# Altium PCB led30.PcbDoc
Units mm, origin at the board's own origin, x right, y up, seen from the top; angles counter-clockwise.
Board outline 15 x 170 mm, 2 copper layers (Top Layer, Bottom Layer); 63 components, 125 nets, 472 pads, 92 vias.
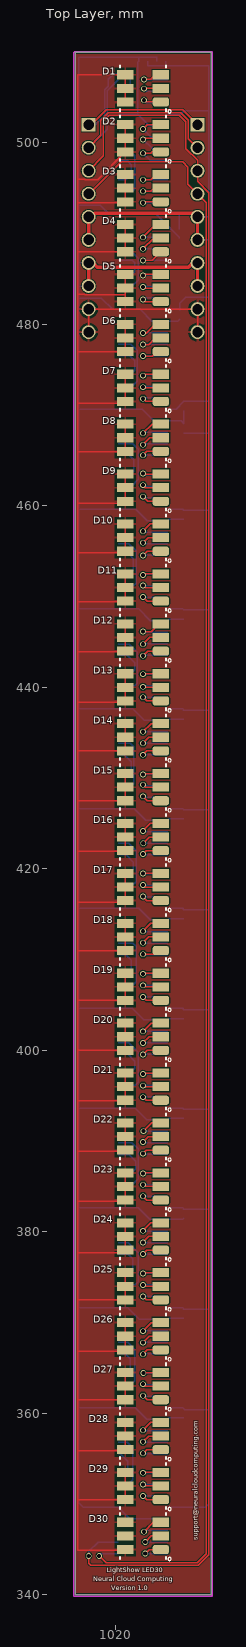
[diagram p0: Top Layer view]
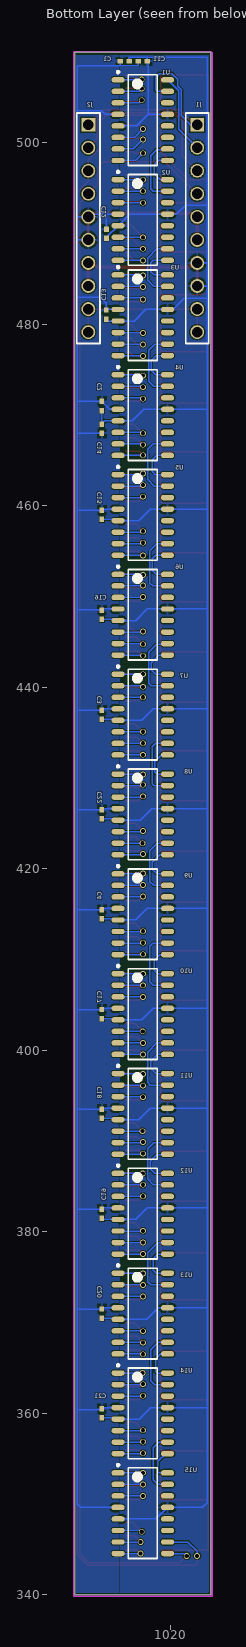
[diagram p1: Bottom Layer view, seen from below]

## Layer stack, top to bottom
Top Solder: solder mask 0.0102, Solder Resist, Dk 3.5
Top Layer: signal copper 0.0356
Dielectric 1: dielectric 0.32, FR-4, Dk 4.8
Bottom Layer: signal copper 0.0356
Bottom Solder: solder mask 0.0102, Solder Resist, Dk 3.5

## Board outline
1015.5,510 1015.5,340 1030.5,340 1030.5,510 1020,510

## Design rules (kind name [scope] priority, off if disabled: settings)
Clearance [All] p1: gap=0.127
PolygonConnect [All] p1: connectstyle=Relief reliefconductorwidth=0.254 reliefentries=4 polygonreliefangle="90 Angle" airgapwidth=0.254
RoomDefinition led30Sheet1 [InComponentClass('led30Sheet1')] p1: confinementstyle=ConfineIn formatcopy=TRUE lockcomponents=FALSE outline 0,0 50.8,0 50.8,25.4 0,25.4
RoutingLayers RoutingLayers_VCCBAT [InNet('VCCBAT')] p1 off: top layer_v5=TRUE bottom layer_v5=FALSE
RoutingLayers RoutingLayers_VCC [InNet('VCC')] p2 off: top layer_v5=TRUE bottom layer_v5=FALSE
RoutingLayers RoutingLayers_GND [InNet('GND')] p3 off: top layer_v5=FALSE bottom layer_v5=TRUE
RoutingLayers [All] p4: top layer_v5=TRUE bottom layer_v5=TRUE
RoutingVias [All] p1: holewidth=0.457 width=0.635 viastyle="Through Hole" minholewidth=0.457 minwidth=0.635 maxholewidth=0.457 maxwidth=0.635
SolderMaskExpansion [All] p1: expansion=0.102
Width [All] p1: maxlimit=0.152 minlimit=0.152 preferedwidth=0.152 minimp=50.000000 maximp=50.000000 favimp=50.000000
29 further rules are at their usual default settings.

## Components (designator, comment, footprint, x,y, rotation, side; value= is the part's Value field where it differs from the comment)
C1 "Cap Semi" 0402 1025,509 r180 bottom
C2 "Cap Semi" 0402 1027.5,471 r270 bottom
C3 "Cap Semi" 0402 1027.5,437 r270 bottom
C4 "Cap Semi" 0402 1027.5,415 r270 bottom
C11 "Cap Semi" 0402 1023,509 r0 bottom
C12 "Cap Semi" 0402 1027,490 r90 bottom
C13 "Cap Semi" 0402 1027.049,481.076 r90 bottom
C14 "Cap Semi" 0402 1027.5,468.5 r270 bottom
C15 "Cap Semi" 0402 1027.5,459 r90 bottom
C16 "Cap Semi" 0402 1027.5,448 r90 bottom
C17 "Cap Semi" 0402 1027.5,404 r90 bottom
C18 "Cap Semi" 0402 1027.5,393 r90 bottom
C19 "Cap Semi" 0402 1027.5,382 r90 bottom
C20 "Cap Semi" 0402 1027.5,371 r90 bottom
C21 "Cap Semi" 0402 1027.5,360 r270 bottom
C22 "Cap Semi" 0402 1027.5,426 r270 bottom
D1 "Wayjun5050SMD" SON150P500X150_HS-7N 1023,506 r0 top
D2 "Wayjun5050SMD" SON150P500X150_HS-7N 1023,500.5 r0 top
D3 "Wayjun5050SMD" SON150P500X150_HS-7N 1023,495 r0 top
D4 "Wayjun5050SMD" SON150P500X150_HS-7N 1023,489.5 r0 top
D5 "Wayjun5050SMD" SON150P500X150_HS-7N 1023,484 r0 top
D6 "Wayjun5050SMD" SON150P500X150_HS-7N 1023,478.5 r0 top
D7 "Wayjun5050SMD" SON150P500X150_HS-7N 1023,473 r0 top
D8 "Wayjun5050SMD" SON150P500X150_HS-7N 1023,467.5 r0 top
D9 "Wayjun5050SMD" SON150P500X150_HS-7N 1023,462 r0 top
D10 "Wayjun5050SMD" SON150P500X150_HS-7N 1023,456.5 r0 top
D11 "Wayjun5050SMD" SON150P500X150_HS-7N 1023,451 r0 top
D12 "Wayjun5050SMD" SON150P500X150_HS-7N 1023,445.5 r0 top
D13 "Wayjun5050SMD" SON150P500X150_HS-7N 1023,440 r0 top
D14 "Wayjun5050SMD" SON150P500X150_HS-7N 1023,434.5 r0 top
D15 "Wayjun5050SMD" SON150P500X150_HS-7N 1023,429 r0 top
D16 "Wayjun5050SMD" SON150P500X150_HS-7N 1023,423.5 r0 top
D17 "Wayjun5050SMD" SON150P500X150_HS-7N 1023,418 r0 top
D18 "Wayjun5050SMD" SON150P500X150_HS-7N 1023,412.5 r0 top
D19 "Wayjun5050SMD" SON150P500X150_HS-7N 1023,407 r0 top
D20 "Wayjun5050SMD" SON150P500X150_HS-7N 1023,401.5 r0 top
D21 "Wayjun5050SMD" SON150P500X150_HS-7N 1023,396 r0 top
D22 "Wayjun5050SMD" SON150P500X150_HS-7N 1023,390.5 r0 top
D23 "Wayjun5050SMD" SON150P500X150_HS-7N 1023,385 r0 top
D24 "Wayjun5050SMD" SON150P500X150_HS-7N 1023,379.5 r0 top
D25 "Wayjun5050SMD" SON150P500X150_HS-7N 1023,374 r0 top
D26 "Wayjun5050SMD" SON150P500X150_HS-7N 1023,368.5 r0 top
D27 "Wayjun5050SMD" SON150P500X150_HS-7N 1023,363 r0 top
D28 "Wayjun5050SMD" SON150P500X150_HS-7N 1023,357.5 r0 top
D29 "Wayjun5050SMD" SON150P500X150_HS-7N 1023,352 r0 top
D30 "Wayjun5050SMD" SON150P500X150_HS-7N 1023,346.5 r0 top
J1 "PPTC101LFBN-RC" PPTC101LFBN-RC 1017,502 r270 bottom
J2 "PPTC101LFBN-RC" PPTC101LFBN-RC 1029,502 r270 bottom
U1 "LPD8806" SOP127P600-8N 1023,502.5 r180 bottom
U2 "LPD8806" SOP127P600-8N 1023,491.5 r180 bottom
U3 "LPD8806" SOP127P600-8N 1023,481 r180 bottom
U4 "LPD8806" SOP127P600-8N 1023,470 r180 bottom
U5 "LPD8806" SOP127P600-8N 1023,459 r180 bottom
U6 "LPD8806" SOP127P600-8N 1023,448 r180 bottom
U7 "LPD8806" SOP127P600-8N 1023,437 r180 bottom
U8 "LPD8806" SOP127P600-8N 1023,426 r180 bottom
U9 "LPD8806" SOP127P600-8N 1023,415 r180 bottom
U10 "LPD8806" SOP127P600-8N 1023,404 r180 bottom
U11 "LPD8806" SOP127P600-8N 1023,393 r180 bottom
U12 "LPD8806" SOP127P600-8N 1023,382 r180 bottom
U13 "LPD8806" SOP127P600-8N 1023,371 r180 bottom
U14 "LPD8806" SOP127P600-8N 1023,360 r180 bottom
U15 "LPD8806" SOP127P600-8N 1023,349 r180 bottom

## Footprints (in the part's own frame and the unit in brackets; to place one, negate y for a bottom-side part, rotate by r counter-clockwise, add the part's x,y. Pads: shape width x height; smd on the part's side, far side on the other; paste and mask are expansions set on the pad)
0402 [mm] "Chip Capacitor, Body 1.0x0.5mm, IPC High Density"
  rect 0.6x0.5 smd: 1(-0.5,0) 2(0.5,0)
  body extent -0.55,-0.3 0.55,0.3, height 1.3
PPTC101LFBN-RC [mil] "Sullins 10 Pin .100 spacing Femal connector - Single Role"
  rect 60x60 hole 45: 1(0,0)
  round 60 hole 45: 2(100,0) 3(200,0) 4(300,0) 5(400,0) 6(500,0) 7(600,0) 8(700,0) 9(800,0) 10(900,0)
  silkscreen extent -50,-50 950,50
SON150P500X150_HS-7N [mm] "SON, 6-Leads, Body 5.00x5.00mm, Pitch 1.50mm, Thermal Pad 4.00x1.50mm, IPC Medium Density"
  rrect50% 1.8x1 smd: 1(1.96,-1.5)
  rect 1.8x1 smd: 2(1.96,0) 3(1.96,1.5) 4(-1.96,1.5) 5(-1.96,0) 6(-1.96,-1.5)
  silkscreen extent -2.54,-2.72 3.1,2.54
SOP127P600-8N [mm]
  oval 1.45x0.6 smd: 1(-2.725,4.445) 2(-2.725,3.175) 3(-2.725,1.905) 4(-2.725,0.635) 5(-2.725,-0.635) 6(-2.725,-1.905) 7(-2.725,-3.175) 8(-2.725,-4.445) 9(2.725,-4.445) 10(2.725,-3.175) 11(2.725,-1.905) 12(2.725,-0.635) 13(2.725,0.635) 14(2.725,1.905) 15(2.725,3.175) 16(2.725,4.445)
  silkscreen extent -2.85,-5 1.6,5.42, body extent -2,-5 2,5, height 1.75

## Part data
C1 C2 C3 C4 C11 C12 C13 C14 C15 C16 C17 C18 C19 C20 C21 C22: "Capacitor (Semiconductor SIM Model)"
J1 J2: "Sullins PPTC101LFBN-RC 10 Position Header Connector 0.100\" (2.54mm) Through Hole Tin"
U1 U2 U3 U4 U5 U6 U7 U8 U9 U10 U11 U12 U13 U14 U15: "LPD8806 LED Driver"

## Via types
v1: diameter 0.635, hole 0.457, Top Layer to Bottom Layer, 92 vias

## Nets (pads, with @x,y where several pads share a name; then routed paths per layer and width w, separated by ;. In a path a pad name is that pad's centre, name@x,y a point inside that pad or via, vN(x,y) a via of type N, cw(c..) or ccw(c..) an arc to the next point about the centre after c; other vN are vias at no path point)
CLK0: J1.2 J2.2 U1.16 | length 26.2
  Top Layer w0.152: J1.2 1018.349,500.81 1018.349,502.475 1019.175,503.301 1027.176,503.301 1028.001,502.475 1028.001,500.459 J2.2
  Bottom Layer w0.152: J1.2 1019.048,501.508 1019.048,505.718 U1.16
CLK11: U10.9 U11.16 | length 5
  Bottom Layer w0.152: U11.16 1021.523,397.445 1022.096,398.018 1022.096,398.818 1021.359,399.555 U10.9
CLK31: J1.4 J2.4 U15.9 | length 181.2
  Top Layer w0.152: J1.4 1017.049,494.38 1020.572,497.903 1027.366,497.903 1027.938,497.332 1027.938,495.442 J2.4 1029.97,493.41 1029.97,344.551 1028.954,343.535 1018.921,343.535 v1(1018.159,344.297)
  Bottom Layer w0.152: v1(1018.159,344.297) 1018.163,344.301 1018.163,344.555 U15.9
DAT0: J1.1 J2.1 U1.15 | length 25.3
  Top Layer w0.152: J1.1 1017.303,502 1018.921,503.618 1027.382,503.618 J2.1
  Bottom Layer w0.152: J1.1 1017.747,502 1018.769,503.022 1018.769,505.834 1019.175,506.24 1019.175,506.984 1019.81,507.619 1021.207,507.619 1021.588,507.238 1021.588,505.841 1021.422,505.675 U1.15
DAT11: U10.10 U11.15 | length 8.3
  Bottom Layer w0.152: U11.15 1022.158,396.175 1022.477,396.494 1022.477,397.155 1022.464,397.167 1022.464,399.809 1021.448,400.825 U10.10
DAT31: J1.3 J2.3 U15.10 | length 193.9
  Top Layer w0.152: J1.3 1018.629,498.549 1018.629,502.36 1019.291,503.022 1027.011,503.022 1027.722,502.31 1027.722,499.373 1029,498.095 J2.3 1029,495.745 1030.249,494.496 1030.249,344.435 1029.07,343.256 1017.245,343.256 1017.016,343.484 1017.016,344.661
  Bottom Layer w0.152: v1(1017.016,344.297) 1017.016,344.805 1018.036,345.825 U15.10
GND: C1.2 C2.2 C3.2 C4.2 C11.1 C12.1 C13.1 C14.1 C15.1 C16.1 C17.1 C18.1 C19.1 C20.1 C21.2 C22.2 J1.7 J1.8 J2.7 J2.8 U1.5 U1.13 U2.5 U2.13 U3.5 U3.13 U4.5 U4.13 U5.5 U5.13 U6.5 U6.13 U7.5 U7.13 U8.5 U8.13 U9.5 U9.13 U10.5 U10.13 U11.5 U11.13 U12.5 U12.13 U13.5 U13.13 U14.5 U14.13 U15.5 U15.13 | length 371.6
  Top Layer w0.152: J1.7 J1.7@1017.491,486.76 ; J2.7@1028.479,486.76 J2.7
  Top Layer w0.381: J1.8 J1.7 ; J1.7@1017.491,486.76 1017.968,486.283 1028.001,486.283 J2.7@1028.479,486.76 ; J2.8 J2.7
  Bottom Layer w0.152: 1015.927,484.22 J1.8 ; J1.7 1015.992,486.76 1015.896,486.664 ; U1.13 1022.389,503.135 ; C1.2 1024.5,509.388 1024.565,509.453 1022.533,509.453 1022.5,509.42 ; U15.5 1021.545,348.365 U15.13 1016.423,349.635 1015.896,350.162 1015.896,360.68 ; U1.5 1023.659,501.865 1022.389,503.135 ; C12.1 1027,489.59 U2.5 1024.455,492.135 U2.13 1019.292,492.135 1018.286,493.141 1015.896,493.141 ; C13.1 1026.838,480.365 U3.5 1023.95,480.365 1022.68,481.635 U3.13 1019.632,481.635 1018.413,482.854 1015.896,482.854 ; C21.2 1025.86,359.5 U14.5 1023.411,359.365 1022.141,360.635 U14.13 1015.941,360.635 1015.896,360.68 ; C20.1 1025.86,370.5 U13.5 1022.571,370.365 1021.301,371.635 U13.13 1015.929,371.635 1015.896,371.602 ; C19.1 1027.365,381.365 U12.5 1023.763,381.365 1022.493,382.635 U12.13 1015.912,382.635 1015.896,382.651 ; C18.1 1025.86,392.5 U11.5 1023.431,392.365 1022.161,393.635 U11.13 1015.958,393.635 1015.896,393.573 ; C17.1 1025.86,403.5 U10.5 1023.099,403.365 1021.829,404.635 U10.13 1015.909,404.635 1015.896,404.622 ; C4.2 1025.86,414.5 U9.5 1023.783,414.365 1022.513,415.635 U9.13 1015.932,415.635 1015.896,415.671 ; C22.2 1025.86,425.5 U8.5 1023.281,425.365 1022.011,426.635 U8.13 1015.938,426.635 1015.896,426.593 ; C3.2 1025.86,436.5 U7.5 1023.119,436.365 1021.849,437.635 U7.13 1015.903,437.635 1015.896,437.642 ; C16.1 1025.86,447.5 U6.5 1023.803,447.365 1022.533,448.635 U6.13 1015.952,448.635 1015.896,448.691 ; C15.1 1025.86,458.5 U5.5 1023.471,458.365 1022.201,459.635 U5.13 1015.918,459.635 1015.896,459.613 ; C2.2 1027.5,469.068 1027.203,469.365 U4.5 1024.155,469.365 1022.885,470.635 U4.13 1015.923,470.635 1015.896,470.662 ; 1015.896,360.68 1015.896,371.602 ; 1015.896,371.602 1015.896,382.651 ; 1015.896,382.651 1015.896,393.573 ; 1015.896,393.573 1015.896,404.622 ; 1015.896,404.622 1015.896,415.671 ; 1015.896,415.671 1015.896,426.593 ; 1015.896,426.593 1015.896,437.642 ; 1015.896,437.642 1015.896,448.691 ; 1015.896,448.691 1015.896,459.613 ; 1015.896,459.613 1015.896,470.662 ; 1015.896,470.662 1015.896,482.854 ; 1015.896,482.854 1015.896,486.664 ; 1015.896,486.664 1015.896,493.141 ; 1015.896,493.141 1015.896,509.42 1022.5,509.42 ; 1022.389,503.135 1022.389,508.889 C11.1 1022.5,509.42
NetD1_1: D1.1 U1.3 | length 4.7
  Top Layer w0.152: v1(1023.112,504.698) 1023.31,504.5 D1.1
  Bottom Layer w0.152: v1(1023.112,504.698) 1023.405,504.405 U1.3
NetD1_2: D1.2 U1.2 | length 4.6
  Top Layer w0.152: v1(1023.112,505.968) 1023.144,506 D1.2
  Bottom Layer w0.152: v1(1023.112,505.968) 1023.405,505.675 U1.2
NetD1_3: D1.3 U1.1 | length 4.7
  Top Layer w0.152: v1(1023.112,506.984) 1023.874,506.984 1024.39,507.5 D1.3
  Bottom Layer w0.152: v1(1023.112,506.984) 1023.151,506.945 U1.1
NetD2_1: D2.1 U1.8 | length 5.1
  Top Layer w0.152: v1(1022.985,498.856) 1023.874,498.856 1024.018,499 D2.1
  Bottom Layer w0.152: v1(1022.985,498.856) 1023.786,498.055 U1.8
NetD2_2: D2.2 U1.7 | length 5.2
  Top Layer w0.152: v1(1022.985,500.38) 1023.105,500.5 D2.2
  Bottom Layer w0.152: v1(1022.985,500.38) 1024.04,499.325 U1.7
NetD2_3: D2.3 U1.6 | length 5.3
  Top Layer w0.152: v1(1022.985,501.523) 1023.462,502 D2.3
  Bottom Layer w0.152: v1(1022.985,501.523) 1023.913,500.595 U1.6
NetD3_1: D3.1 U2.3 | length 4.8
  Top Layer w0.152: v1(1022.985,493.395) 1023.09,493.5 D3.1
  Bottom Layer w0.152: v1(1022.985,493.395) 1022.995,493.405 U2.3
NetD3_2: D3.2 U2.2 | length 4.9
  Top Layer w0.152: v1(1022.985,494.665) 1023.874,494.665 1024.209,495 D3.2
  Bottom Layer w0.152: v1(1022.985,494.665) 1022.995,494.675 U2.2
NetD3_3: D3.3 U2.1 | length 5
  Top Layer w0.152: v1(1022.985,495.935) 1023.874,495.935 1024.439,496.5 D3.3
  Bottom Layer w0.152: v1(1022.985,495.935) 1022.995,495.945 U2.1
NetD4_1: D4.1 U2.8 | length 5.1
  Top Layer w0.152: v1(1022.985,487.045) 1024.005,487.045 D4.1
  Bottom Layer w0.152: v1(1022.985,487.045) 1022.995,487.055 U2.8
NetD4_2: D4.2 U2.7 | length 5.2
  Top Layer w0.152: v1(1022.985,488.315) 1024.17,489.5 D4.2
  Bottom Layer w0.152: v1(1022.985,488.315) 1022.995,488.325 U2.7
NetD4_3: D4.3 U2.6 | length 5.3
  Top Layer w0.152: v1(1022.985,489.585) 1024.4,491 D4.3
  Bottom Layer w0.152: v1(1022.985,489.585) 1022.995,489.595 U2.6
NetD5_1: D5.1 U3.3 | length 4.9
  Top Layer w0.152: v1(1022.985,482.727) 1023.212,482.5 D5.1
  Bottom Layer w0.152: v1(1022.985,482.727) 1023.163,482.905 U3.3
NetD5_2: D5.2 U3.2 | length 4.8
  Top Layer w0.152: v1(1022.985,484.124) 1023.109,484 D5.2
  Bottom Layer w0.152: v1(1022.985,484.124) 1023.036,484.175 U3.2
NetD5_3: D5.3 U3.1 | length 4.8
  Top Layer w0.152: v1(1022.985,485.394) 1023.091,485.5 D5.3
  Bottom Layer w0.152: v1(1022.985,485.394) 1023.036,485.445 U3.1
NetD6_1: D6.1 U3.8 | length 4.9
  Top Layer w0.152: v1(1022.985,476.504) 1024.001,476.504 1024.497,477 D6.1
  Bottom Layer w0.152: v1(1022.985,476.504) 1023.036,476.555 U3.8
NetD6_2: D6.2 U3.7 | length 5
  Top Layer w0.152: v1(1022.985,477.774) 1023.62,477.774 1024.346,478.5 D6.2
  Bottom Layer w0.152: v1(1022.985,477.774) 1023.036,477.825 U3.7
NetD6_3: D6.3 U3.6 | length 5.1
  Top Layer w0.152: v1(1022.985,479.044) 1023.366,479.044 1024.322,480 D6.3
  Bottom Layer w0.152: v1(1022.985,479.044) 1023.036,479.095 U3.6
NetD7_1: D7.1 U4.3 | length 4.9
  Top Layer w0.152: v1(1022.985,471.805) 1023.29,471.5 D7.1
  Bottom Layer w0.152: v1(1022.985,471.805) 1023.085,471.905 U4.3
NetD7_2: D7.2 U4.2 | length 4.8
  Top Layer w0.152: v1(1022.985,473.075) 1023.06,473 D7.2
  Bottom Layer w0.152: v1(1022.985,473.075) 1023.085,473.175 U4.2
NetD7_3: D7.3 U4.1 | length 4.8
  Top Layer w0.152: v1(1022.985,474.345) 1023.14,474.5 D7.3
  Bottom Layer w0.152: v1(1022.985,474.345) 1023.085,474.445 U4.1
NetD8_1: D8.1 U4.8 | length 4.9
  Top Layer w0.152: v1(1022.985,465.582) 1023.403,466 D8.1
  Bottom Layer w0.152: v1(1022.985,465.582) 1023.012,465.555 U4.8
NetD8_2: D8.2 U4.7 | length 5.1
  Top Layer w0.152: v1(1022.985,466.725) 1023.76,467.5 D8.2
  Bottom Layer w0.152: v1(1022.985,466.725) 1023.085,466.825 U4.7
NetD8_3: D8.3 U4.6 | length 5.2
  Top Layer w0.152: v1(1022.985,467.995) 1023.99,469 D8.3
  Bottom Layer w0.152: v1(1022.985,467.995) 1023.085,468.095 U4.6
NetD9_1: D9.1 U5.3 | length 5
  Top Layer w0.152: v1(1022.985,461.01) 1023.495,460.5 D9.1
  Bottom Layer w0.152: v1(1022.985,461.01) 1023.09,460.905 U5.3
NetD9_2: D9.2 U5.2 | length 4.9
  Top Layer w0.152: v1(1022.985,462.28) 1023.265,462 D9.2
  Bottom Layer w0.152: v1(1022.985,462.28) 1023.09,462.175 U5.2
NetD9_3: D9.3 U5.1 | length 4.8
  Top Layer w0.152: v1(1022.985,463.55) 1023.035,463.5 D9.3
  Bottom Layer w0.152: v1(1022.985,463.55) 1023.09,463.445 U5.1
NetD10_1: D10.1 U5.8 | length 4.9
  Top Layer w0.152: v1(1022.985,454.533) 1023.452,455 D10.1
  Bottom Layer w0.152: v1(1022.985,454.533) 1023.007,454.555 U5.8
NetD10_2: D10.2 U5.7 | length 5
  Top Layer w0.152: v1(1022.985,455.93) 1023.555,456.5 D10.2
  Bottom Layer w0.152: v1(1022.985,455.93) 1023.09,455.825 U5.7
NetD10_3: D10.3 U5.6 | length 5.1
  Top Layer w0.152: v1(1022.985,457.2) 1023.785,458 D10.3
  Bottom Layer w0.152: v1(1022.985,457.2) 1023.09,457.095 U5.6
NetD11_1: D11.1 U6.3 | length 4.9
  Top Layer w0.152: v1(1022.985,449.961) 1023.446,449.5 D11.1
  Bottom Layer w0.152: v1(1022.985,449.961) 1023.041,449.905 U6.3
NetD11_2: D11.2 U6.2 | length 4.8
  Top Layer w0.152: v1(1022.985,451.231) 1023.216,451 D11.2
  Bottom Layer w0.152: v1(1022.985,451.231) 1023.041,451.175 U6.2
NetD11_3: D11.3 U6.1 | length 4.8
  Top Layer w0.152: v1(1022.985,452.374) 1023.111,452.5 D11.3
  Bottom Layer w0.152: v1(1022.985,452.374) 1023.056,452.445 U6.1
NetD12_1: D12.1 U6.8 | length 5
  Top Layer w0.152: v1(1022.985,443.484) 1023.501,444 D12.1
  Bottom Layer w0.152: v1(1022.985,443.484) 1023.056,443.555 U6.8
NetD12_2: D12.2 U6.7 | length 5.1
  Top Layer w0.152: v1(1022.985,444.754) 1023.731,445.5 D12.2
  Bottom Layer w0.152: v1(1022.985,444.754) 1023.056,444.825 U6.7
NetD12_3: D12.3 U6.6 | length 5.1
  Top Layer w0.152: v1(1022.985,446.151) 1023.924,446.151 1024.773,447 D12.3
  Bottom Layer w0.152: v1(1022.985,446.151) 1023.041,446.095 U6.6
NetD13_1: D13.1 U7.3 | length 4.9
  Top Layer w0.152: v1(1022.985,438.912) 1023.397,438.5 D13.1
  Bottom Layer w0.152: v1(1022.985,438.912) 1025.718,438.912 U7.3
NetD13_2: D13.2 U7.2 | length 4.8
  Top Layer w0.152: v1(1022.985,440.055) 1023.04,440 D13.2
  Bottom Layer w0.152: v1(1022.985,440.055) 1023.105,440.175 U7.2
NetD13_3: D13.3 U7.1 | length 4.7
  Top Layer w0.152: v1(1022.985,441.452) 1023.033,441.5 D13.3
  Bottom Layer w0.152: v1(1022.985,441.452) 1022.992,441.445 U7.1
NetD14_1: D14.1 U7.8 | length 4.9
  Top Layer w0.152: v1(1022.985,432.562) 1023.423,433 D14.1
  Bottom Layer w0.152: v1(1022.985,432.562) 1022.992,432.555 U7.8
NetD14_2: D14.2 U7.7 | length 5
  Top Layer w0.152: v1(1022.985,433.832) 1023.653,434.5 D14.2
  Bottom Layer w0.152: v1(1022.985,433.832) 1022.992,433.825 U7.7
NetD14_3: D14.3 U7.6 | length 5.1
  Top Layer w0.152: v1(1022.985,435.102) 1023.883,436 D14.3
  Bottom Layer w0.152: v1(1022.985,435.102) 1022.992,435.095 U7.6
NetD15_1: D15.1 U8.3 | length 5
  Top Layer w0.152: v1(1022.985,427.99) 1023.475,427.5 D15.1
  Bottom Layer w0.152: v1(1022.985,427.99) 1023.07,427.905 U8.3
NetD15_2: D15.2 U8.2 | length 4.9
  Top Layer w0.152: v1(1022.985,429.26) 1023.245,429 D15.2
  Bottom Layer w0.152: v1(1022.985,429.26) 1023.07,429.175 U8.2
NetD15_3: D15.3 U8.1 | length 4.8
  Top Layer w0.152: v1(1022.985,430.403) 1023.082,430.5 D15.3
  Bottom Layer w0.152: v1(1022.985,430.403) 1023.027,430.445 U8.1
NetD16_1: D16.1 U8.8 | length 4.9
  Top Layer w0.152: v1(1022.985,421.64) 1023.345,422 D16.1
  Bottom Layer w0.152: v1(1022.985,421.64) 1023.07,421.555 U8.8
NetD16_2: D16.2 U8.7 | length 4.9
  Top Layer w0.152: v1(1023.027,422.825) 1023.702,423.5 D16.2
  Bottom Layer w0.152: v1(1023.027,422.825) U8.7
NetD16_3: D16.3 U8.6 | length 5.1
  Top Layer w0.152: v1(1022.985,424.18) 1023.805,425 D16.3
  Bottom Layer w0.152: v1(1022.985,424.18) 1023.07,424.095 U8.6
NetD17_1: D17.1 U9.3 | length 4.9
  Top Layer w0.152: v1(1022.985,416.941) 1023.426,416.5 D17.1
  Bottom Layer w0.152: v1(1022.985,416.941) 1023.021,416.905 U9.3
NetD17_2: D17.2 U9.2 | length 4.8
  Top Layer w0.152: v1(1022.985,418.211) 1023.196,418 D17.2
  Bottom Layer w0.152: v1(1022.985,418.211) 1023.021,418.175 U9.2
NetD17_3: D17.3 U9.1 | length 4.7
  Top Layer w0.152: v1(1022.985,419.481) 1023.004,419.5 D17.3
  Bottom Layer w0.152: v1(1022.985,419.481) 1023.021,419.445 U9.1
NetD18_1: D18.1 U9.8 | length 4.9
  Top Layer w0.152: v1(1022.985,410.591) 1024.551,410.591 D18.1
  Bottom Layer w0.152: v1(1022.985,410.591) 1023.021,410.555 U9.8
NetD18_2: D18.2 U9.7 | length 5
  Top Layer w0.152: v1(1022.985,411.861) 1023.624,412.5 D18.2
  Bottom Layer w0.152: v1(1022.985,411.861) 1023.021,411.825 U9.7
NetD18_3: D18.3 U9.6 | length 5.1
  Top Layer w0.152: v1(1022.985,413.131) 1023.854,414 D18.3
  Bottom Layer w0.152: v1(1022.985,413.131) 1023.021,413.095 U9.6
NetD19_1: D19.1 U10.3 | length 4.9
  Top Layer w0.152: v1(1022.985,405.892) 1023.377,405.5 D19.1
  Bottom Layer w0.152: v1(1022.985,405.892) 1022.998,405.905 U10.3
NetD19_2: D19.2 U10.2 | length 4.8
  Top Layer w0.152: v1(1022.985,407.162) 1023.147,407 D19.2
  Bottom Layer w0.152: v1(1022.985,407.162) 1022.998,407.175 U10.2
NetD19_3: D19.3 U10.1 | length 4.7
  Top Layer w0.152: v1(1022.985,408.432) 1023.053,408.5 D19.3
  Bottom Layer w0.152: v1(1022.985,408.432) 1022.998,408.445 U10.1
NetD20_1: D20.1 U10.8 | length 4.9
  Top Layer w0.152: v1(1022.985,399.542) 1023.443,400 D20.1
  Bottom Layer w0.152: v1(1022.985,399.542) 1022.998,399.555 U10.8
NetD20_2: D20.2 U10.7 | length 5
  Top Layer w0.152: v1(1022.985,400.812) 1023.673,401.5 D20.2
  Bottom Layer w0.152: v1(1022.985,400.812) 1022.998,400.825 U10.7
NetD20_3: D20.3 U10.6 | length 5.1
  Top Layer w0.152: v1(1022.998,402.095) 1023.903,403 D20.3
  Bottom Layer w0.152: v1(1022.998,402.095) U10.6
NetD21_1: D21.1 U11.3 | length 4.9
  Top Layer w0.152: v1(1022.985,394.843) 1023.328,394.5 D21.1
  Bottom Layer w0.152: v1(1022.985,394.843) 1023.047,394.905 U11.3
NetD21_2: D21.2 U11.2 | length 4.8
  Top Layer w0.152: v1(1022.985,396.113) 1023.098,396 D21.2
  Bottom Layer w0.152: v1(1022.985,396.113) 1023.047,396.175 U11.2
NetD21_3: D21.3 U11.1 | length 4.8
  Top Layer w0.152: v1(1022.985,397.383) 1023.102,397.5 D21.3
  Bottom Layer w0.152: v1(1022.985,397.383) 1023.047,397.445 U11.1
NetD22_1: D22.1 U11.8 | length 4.9
  Top Layer w0.152: v1(1022.985,388.62) 1023.365,389 D22.1
  Bottom Layer w0.152: v1(1022.985,388.62) 1023.05,388.555 U11.8
NetD22_2: D22.2 U11.7 | length 5
  Top Layer w0.152: v1(1022.985,389.89) 1023.595,390.5 D22.2
  Bottom Layer w0.152: v1(1022.985,389.89) 1023.05,389.825 U11.7
NetD22_3: D22.3 U11.6 | length 5
  Top Layer w0.152: v1(1023.047,391.095) 1023.952,392 D22.3
  Bottom Layer w0.152: v1(1023.047,391.095) U11.6
NetD23_1: D23.1 U12.3 | length 4.9
  Top Layer w0.152: v1(1022.985,383.921) 1023.406,383.5 D23.1
  Bottom Layer w0.152: v1(1022.985,383.921) 1023.001,383.905 U12.3
NetD23_2: D23.2 U12.2 | length 4.8
  Top Layer w0.152: v1(1022.985,385.191) 1023.176,385 D23.2
  Bottom Layer w0.152: v1(1022.985,385.191) 1023.001,385.175 U12.2
NetD23_3: D23.3 U12.1 | length 4.7
  Top Layer w0.152: v1(1023.001,386.445) 1023.056,386.5 D23.3
  Bottom Layer w0.152: v1(1023.001,386.445) U12.1
NetD24_1: D24.1 U12.8 | length 4.9
  Top Layer w0.152: v1(1022.985,377.571) 1023.414,378 D24.1
  Bottom Layer w0.152: v1(1022.985,377.571) 1023.001,377.555 U12.8
NetD24_2: D24.2 U12.7 | length 5
  Top Layer w0.152: v1(1022.985,378.841) 1023.644,379.5 D24.2
  Bottom Layer w0.152: v1(1022.985,378.841) 1023.001,378.825 U12.7
NetD24_3: D24.3 U12.6 | length 5.1
  Top Layer w0.152: v1(1022.985,380.111) 1023.874,381 D24.3
  Bottom Layer w0.152: v1(1022.985,380.111) 1023.001,380.095 U12.6
NetD25_1: D25.1 U13.3 | length 4.9
  Top Layer w0.152: v1(1022.985,372.872) 1023.357,372.5 D25.1
  Bottom Layer w0.152: v1(1022.985,372.872) 1023.018,372.905 U13.3
NetD25_2: D25.2 U13.2 | length 4.8
  Top Layer w0.152: v1(1022.985,374.142) 1023.127,374 D25.2
  Bottom Layer w0.152: v1(1022.985,374.142) 1023.018,374.175 U13.2
NetD25_3: D25.3 U13.1 | length 4.8
  Top Layer w0.152: v1(1022.985,375.412) 1023.073,375.5 D25.3
  Bottom Layer w0.152: v1(1022.985,375.412) 1023.018,375.445 U13.1
NetD26_1: D26.1 U13.8 | length 4.9
  Top Layer w0.152: v1(1022.985,366.522) 1023.463,367 D26.1
  Bottom Layer w0.152: v1(1022.985,366.522) 1023.018,366.555 U13.8
NetD26_2: D26.2 U13.7 | length 5
  Top Layer w0.152: v1(1022.985,367.792) 1023.693,368.5 D26.2
  Bottom Layer w0.152: v1(1022.985,367.792) 1023.018,367.825 U13.7
NetD26_3: D26.3 U13.6 | length 5.1
  Top Layer w0.152: v1(1022.985,369.062) 1023.923,370 D26.3
  Bottom Layer w0.152: v1(1022.985,369.062) 1023.018,369.095 U13.6
NetD27_1: D27.1 U14.3 | length 4.9
  Top Layer w0.152: v1(1022.985,361.95) 1023.435,361.5 D27.1
  Bottom Layer w0.152: v1(1022.985,361.95) 1023.03,361.905 U14.3
NetD27_2: D27.2 U14.2 | length 4.8
  Top Layer w0.152: v1(1022.985,363.22) 1023.205,363 D27.2
  Bottom Layer w0.152: v1(1022.985,363.22) 1023.03,363.175 U14.2
NetD27_3: D27.3 U14.1 | length 4.6
  Top Layer w0.152: v1(1023.03,364.445) 1023.085,364.5 D27.3
  Bottom Layer w0.152: v1(1023.03,364.445) U14.1
NetD28_1: D28.1 U14.8 | length 4.9
  Top Layer w0.152: v1(1022.985,355.6) 1023.385,356 D28.1
  Bottom Layer w0.152: v1(1022.985,355.6) 1023.03,355.555 U14.8
NetD28_2: D28.2 U14.7 | length 5
  Top Layer w0.152: v1(1022.985,356.87) 1023.615,357.5 D28.2
  Bottom Layer w0.152: v1(1022.985,356.87) 1023.03,356.825 U14.7
NetD28_3: D28.3 U14.6 | length 5.1
  Top Layer w0.152: v1(1022.985,358.14) 1023.845,359 D28.3
  Bottom Layer w0.152: v1(1022.985,358.14) 1023.03,358.095 U14.6
NetD29_1: D29.1 U15.3 | length 4.9
  Top Layer w0.152: v1(1022.985,350.901) 1023.386,350.5 D29.1
  Bottom Layer w0.152: v1(1022.985,350.901) 1022.989,350.905 U15.3
NetD29_2: D29.2 U15.2 | length 4.8
  Top Layer w0.152: v1(1022.985,352.171) 1023.156,352 D29.2
  Bottom Layer w0.152: v1(1022.985,352.171) 1022.989,352.175 U15.2
NetD29_3: D29.3 U15.1 | length 4.7
  Top Layer w0.152: v1(1022.989,353.445) 1023.044,353.5 D29.3
  Bottom Layer w0.152: v1@1022.985,353.441 v1(1022.989,353.445) U15.1
NetD30_1: D30.1 U15.8 | length 4.6
  Top Layer w0.152: v1(1023.243,344.555) 1023.688,345 D30.1
  Bottom Layer w0.152: v1@1023.112,344.424 v1(1023.243,344.555) U15.8
NetD30_2: D30.2 U15.7 | length 4.5
  Top Layer w0.152: v1(1023.235,345.825) 1023.91,346.5 D30.2
  Bottom Layer w0.152: v1(1023.235,345.825) U15.7
NetD30_3: D30.3 U15.6 | length 4.9
  Top Layer w0.152: v1(1023.112,346.964) 1024.148,348 D30.3
  Bottom Layer w0.152: v1(1023.112,346.964) 1023.243,347.095 U15.6
NetU1_9: U1.9 U2.16 | length 4.3
  Bottom Layer w0.152: U2.16 1021.09,495.945 1021.715,496.57 1021.715,497.586 1021.246,498.055 U1.9
NetU1_10: U1.10 U2.15 | length 7.7
  Bottom Layer w0.152: U2.15 1021.852,494.675 1022.096,494.919 1022.096,498.602 1021.461,499.237 1020.363,499.237 U1.10
NetU2_9: U2.9 U3.16 | length 4.9
  Bottom Layer w0.152: U3.16 1021.728,485.445 1022.096,485.813 1022.096,486.791 1021.832,487.055 U2.9
NetU2_10: U2.10 U3.15 | length 7.5
  Bottom Layer w0.152: U3.15 1021.766,484.175 1022.464,484.873 1022.464,487.273 1022.477,487.286 1021.448,488.315 1020.285,488.315 U2.10
NetU3_9: U3.9 U4.16 | length 5.1
  Bottom Layer w0.152: U4.16 1021.561,474.445 1022.071,474.955 1022.071,475.996 1021.512,476.555 U3.9
NetU3_10: U3.10 U4.15 | length 8.1
  Bottom Layer w0.152: U4.15 1021.815,473.175 1022.35,473.71 1022.35,477.139 1021.664,477.825 U3.10
NetU4_9: U4.9 U5.16 | length 5
  Bottom Layer w0.152: U5.16 1021.61,463.445 1021.969,463.804 1021.969,465.074 1021.488,465.555 U4.9
NetU4_10: U4.10 U5.15 | length 8.3
  Bottom Layer w0.152: U5.15 1021.737,462.175 1022.464,462.902 1022.464,465.81 1022.477,465.823 1022.477,466.217 1021.869,466.825 U4.10
NetU5_9: U5.9 U6.16 | length 5
  Bottom Layer w0.152: U6.16 1021.507,452.445 1021.944,452.882 1021.944,454.177 1021.566,454.555 U5.9
NetU5_10: U5.10 U6.15 | length 7.9
  Bottom Layer w0.152: U6.15 1021.913,451.175 1022.223,451.485 1022.223,455.041 1021.439,455.825 U5.10
NetU6_9: U6.9 U7.16 | length 4.9
  Bottom Layer w0.152: U7.16 1021.556,441.445 1022.071,441.96 1022.071,442.722 1021.238,443.555 U6.9
NetU6_10: U6.10 U7.15 | length 8.1
  Bottom Layer w0.152: U7.15 1022.089,440.175 1022.35,440.436 1022.35,443.865 1021.461,444.754 1020.346,444.754 U6.10
NetU7_9: U7.9 U8.16 | length 4.3
  Bottom Layer w0.152: U8.16 1021.419,430.445 1021.69,430.716 1021.69,431.8 1020.935,432.555 U7.9
NetU7_10: U7.10 U8.15 | length 7.7
  Bottom Layer w0.152: U8.15 1021.757,429.175 1021.969,429.387 1021.969,433.451 1021.595,433.825 U7.10
NetU8_9: U8.9 U9.16 | length 4.7
  Bottom Layer w0.152: U9.16 1021.425,419.445 1021.944,419.964 1021.944,420.751 1021.14,421.555 U8.9
NetU8_10: U8.10 U9.15 | length 7.8
  Bottom Layer w0.152: U9.15 1021.806,418.175 1022.223,418.592 1022.223,422.021 1021.419,422.825 U8.10
NetU9_9: U9.9 U10.16 | length 4.4
  Bottom Layer w0.152: U10.16 1021.347,408.445 1021.715,408.813 1021.715,409.956 1021.116,410.555 U9.9
NetU9_10: U9.10 U10.15 | length 8.1
  Bottom Layer w0.152: U10.15 1021.855,407.175 1022.223,407.543 1022.223,411.48 1021.878,411.825 U9.10
NetU11_9: U11.9 U12.16 | length 5.2
  Bottom Layer w0.152: U12.16 1021.699,386.445 1022.198,386.944 1022.198,387.756 1021.461,388.493 1020.337,388.493 U11.9
NetU11_10: U11.10 U12.15 | length 8.3
  Bottom Layer w0.152: U12.15 1021.826,385.175 1022.477,385.826 1022.477,388.392 1022.464,388.404 1022.464,389.141 1021.78,389.825 U11.10
NetU12_9: U12.9 U13.16 | length 4.8
  Bottom Layer w0.152: U13.16 1021.494,375.445 1021.842,375.793 1021.842,377.063 1021.35,377.555 U12.9
NetU12_10: U12.10 U13.15 | length 8.2
  Bottom Layer w0.152: U13.15 1022.129,374.175 1022.477,374.523 1022.477,375.184 1022.464,375.196 1022.464,377.711 1021.35,378.825 U12.10
NetU13_9: U13.9 U14.16 | length 4.3
  Bottom Layer w0.152: U14.16 1021.416,364.445 1021.588,364.617 1021.588,366.014 1021.047,366.555 U13.9
NetU13_10: U13.10 U14.15 | length 7.6
  Bottom Layer w0.152: U14.15 1021.67,363.175 1022.096,363.601 1022.096,367.03 1021.301,367.825 U13.10
NetU14_9: U14.9 U15.16 | length 3.7
  Bottom Layer w0.152: U15.16 1021.33,353.445 1021.33,354.715 1020.49,355.555 U14.9
NetU14_10: U14.10 U15.15 | length 7.1
  Bottom Layer w0.152: U15.15 1021.33,352.175 1021.842,352.687 1021.842,356.235 1021.252,356.825 U14.10
VCC: C1.1 C2.1 C3.1 C4.1 C11.2 C12.2 C13.2 C14.2 C15.2 C16.2 C17.2 C18.2 C19.2 C20.2 C21.1 C22.1 J1.5 J1.6 J2.5 J2.6 U1.4 U2.4 U3.4 U4.4 U5.4 U6.4 U7.4 U8.4 U9.4 U10.4 U11.4 U12.4 U13.4 U14.4 U15.4 | length 259.3
  Top Layer w0.152: J1.5 1017.239,491.84 1017.651,492.252 ; J2.5@1028.588,492.252 J2.5
  Top Layer w0.381: J1.6 J1.5 ; 1017.651,492.252 J2.5@1028.588,492.252 ; J2.6 J2.5
  Bottom Layer w0.152: C11.2 1023.5,508.515 1023.507,508.508 1025.525,508.508 ; C1.1 1025.5,508.533 1025.525,508.508 ; U15.4 1029.847,349.635 1030.224,350.012 1030.224,360.426 ; U14.4 1027.365,360.635 C21.1 1027.574,360.426 1030.224,360.426 ; U13.4 1027.365,371.635 C20.2 1030.199,371.5 1030.224,371.475 ; U12.4 1027.365,382.635 C19.2 1030.2,382.5 1030.224,382.524 ; U11.4 1027.365,393.635 C18.2 1030.151,393.5 1030.224,393.573 ; U10.4 1027.365,404.635 C17.2 1030.219,404.5 1030.224,404.495 ; U9.4 1027.365,415.635 C4.1 1030.141,415.5 1030.224,415.417 ; U8.4 1027.365,426.635 C22.1 1030.19,426.5 1030.224,426.466 ; U7.4 1027.365,437.635 C3.1 1030.209,437.5 1030.224,437.515 ; U6.4 1027.365,448.635 1027.436,448.564 1030.224,448.564 ; U5.4 1027.365,459.635 C15.2 1030.21,459.5 1030.224,459.486 ; U4.4 1026.635,470.635 C2.1 1030.173,471.5 1030.224,471.551 ; U3.4 1026.99,481.635 C13.2 1027.049,482.346 1027.684,482.981 1030.224,482.981 ; U2.4 1027.049,492.135 ; U1.4 1027.137,503.135 1027.557,503.555 1030.224,503.555 ; C12.2 1027,492.086 1027.049,492.135 ; C14.2 1030.219,468 1030.224,467.995 ; J2.6 1030.193,489.3 1030.224,489.331 ; 1025.525,508.508 1030.224,508.508 1030.224,503.555 ; 1027.049,492.135 1028.705,492.135 J2.5 1030.193,491.84 1030.224,491.871 ; 1030.224,360.426 1030.224,371.475 ; 1030.224,371.475 1030.224,382.524 ; 1030.224,382.524 1030.224,393.573 ; 1030.224,393.573 1030.224,404.495 ; 1030.224,404.495 1030.224,415.417 ; 1030.224,415.417 1030.224,426.466 ; 1030.224,426.466 1030.224,437.515 ; 1030.224,437.515 1030.224,448.564 ; 1030.224,448.564 1030.224,459.486 ; 1030.224,459.486 1030.224,467.995 ; 1030.224,467.995 1030.224,471.551 ; 1030.224,471.551 1030.224,482.981 ; 1030.224,482.981 1030.224,489.331 ; 1030.224,489.331 1030.224,491.871 ; 1030.224,491.871 1030.224,503.555
VCCBAT: D1.4 D1.5 D1.6 D2.4 D2.5 D2.6 D3.4 D3.5 D3.6 D4.4 D4.5 D4.6 D5.4 D5.5 D5.6 D6.4 D6.5 D6.6 D7.4 D7.5 D7.6 D8.4 D8.5 D8.6 D9.4 D9.5 D9.6 D10.4 D10.5 D10.6 D11.4 D11.5 D11.6 D12.4 D12.5 D12.6 D13.4 D13.5 D13.6 D14.4 D14.5 D14.6 D15.4 D15.5 D15.6 D16.4 D16.5 D16.6 D17.4 D17.5 D17.6 D18.4 D18.5 D18.6 D19.4 D19.5 D19.6 D20.4 D20.5 D20.6 D21.4 D21.5 D21.6 D22.4 D22.5 D22.6 D23.4 D23.5 D23.6 D24.4 D24.5 D24.6 D25.4 D25.5 D25.6 D26.4 D26.5 D26.6 D27.4 D27.5 D27.6 D28.4 D28.5 D28.6 D29.4 D29.5 D29.6 D30.4 D30.5 D30.6 J1.9 J1.10 J2.9 J2.10 | length 426.1
  Top Layer w0.152: J1.10 J1.9 J2.9 J2.10 ; D30.6@1020.98,344.94 1015.802,344.94 1015.802,350.52 ; D29.4 D29.5 D29.6 1015.822,350.5 1015.802,350.52 ; D28.4 D28.5 D28.6 1020.894,355.854 1015.802,355.854 ; D27.4 D27.5 D27.6 1015.807,361.5 1015.802,361.505 ; D26.4 D26.5 D26.6 1020.88,366.839 1015.802,366.839 ; D25.4 D25.5 D25.6 1015.856,372.5 1015.802,372.554 ; D24.4 D24.5 D24.6 1020.738,377.698 1015.802,377.698 ; D23.4 D23.5 D23.6 1020.889,383.349 1015.802,383.349 ; D22.4 D22.5 D22.6 1020.914,388.874 1015.802,388.874 ; D21.4 D21.5 D21.6 1021.002,394.462 1015.865,394.462 1015.802,394.525 ; D20.4 D20.5 D20.6 1015.915,400 1015.802,400.113 ; D19.4 D19.5 D19.6 1015.813,405.5 1015.802,405.511 ; D18.4 D18.5 D18.6 1015.837,411 1015.802,411.035 ; D17.4 D17.5 D17.6 1020.846,416.306 1015.802,416.306 ; D16.4 D16.5 D16.6 1020.998,421.957 1015.802,421.957 ; D15.4 D15.5 D15.6 1021.022,427.482 1015.802,427.482 ; D14.4 D14.5 D14.6 1015.808,433 1015.802,433.006 ; D13.4 D13.5 D13.6 1020.881,438.34 1015.802,438.34 ; D12.4 D12.5 D12.6 1020.968,443.928 1015.802,443.928 ; D11.4 D11.5 D11.6 1020.993,449.453 1015.802,449.453 ; D10.4 D10.5 D10.6 1020.891,454.85 1015.802,454.85 ; D9.4 D9.5 D9.6 1020.852,460.311 1015.802,460.311 ; D8.4 D8.5 D8.6 1021.003,465.963 1015.802,465.963 ; D7.4 D7.5 D7.6 1020.837,471.297 1015.802,471.297 ; D6.4 D6.5 D6.6 1015.814,477 1015.802,477.012 ; D5.6 1021.04,483.298 ; D5.4 D5.5 1021.04,483.298 ; D4.4 D4.5 D4.6 1015.863,488 1015.802,488.061 ; D3.4 D3.5 D3.6 1021.04,493.415 1015.821,493.415 1015.802,493.395 ; D2.4 D2.5 D2.6 1017.995,495.955 1016.6,495.955 1016.557,495.998 1015.802,495.998 ; D1.6 D1.5 D1.4 1015.802,507.5 1015.802,495.998 ; 1015.802,350.52 1015.802,355.854 ; 1015.802,355.854 1015.802,361.505 ; 1015.802,361.505 1015.802,366.839 ; 1015.802,366.839 1015.802,372.554 ; 1015.802,372.554 1015.802,377.698 ; 1015.802,377.698 1015.802,383.349 ; 1015.802,383.349 1015.802,388.874 ; 1015.802,388.874 1015.802,394.525 ; 1015.802,394.525 1015.802,400.113 ; 1015.802,400.113 1015.802,405.511 ; 1015.802,405.511 1015.802,411.035 ; 1015.802,411.035 1015.802,416.306 ; 1015.802,416.306 1015.802,421.957 ; 1015.802,421.957 1015.802,427.482 ; 1015.802,427.482 1015.802,433.006 ; 1015.802,433.006 1015.802,438.34 ; 1015.802,438.34 1015.802,443.928 ; 1015.802,443.928 1015.802,449.453 ; 1015.802,449.453 1015.802,454.85 ; 1015.802,454.85 1015.802,460.311 ; 1015.802,460.311 1015.802,465.963 ; 1015.802,465.963 1015.802,471.297 ; 1015.802,471.297 1015.802,477.012 ; 1015.802,477.012 1015.802,483.298 ; 1015.802,483.298 1016.557,483.298 1016.6,483.255 1020.996,483.255 1021.04,483.298 ; 1015.802,483.298 1015.802,488.061 ; 1015.802,488.061 1015.802,493.395 ; 1015.802,493.395 1015.802,495.998
pads on no net: U1.11 U1.12 U1.14 U2.11 U2.12 U2.14 U3.11 U3.12 U3.14 U4.11 U4.12 U4.14 U5.11 U5.12 U5.14 U6.11 U6.12 U6.14 U7.11 U7.12 U7.14 U8.11 U8.12 U8.14 U9.11 U9.12 U9.14 U10.11 U10.12 U10.14 U11.11 U11.12 U11.14 U12.11 U12.12 U12.14 U13.11 U13.12 U13.14 U14.11 U14.12 U14.14 U15.11 U15.12 U15.14

## Polygon pours and split planes (outlines as drawn)
VCCBAT on Top Layer "VCCBATTOP" (solid, remove dead copper, pour order 5): 1015.619,509.778 1015.619,340.233 1030.478,340.233 1030.351,340.36 1030.351,509.778 1015.619,509.778
GND on Bottom Layer "GND" (solid, remove dead copper, pour order 7): 1015.746,509.651 1025.525,509.651 1025.525,340.233 1020.445,340.233 1015.619,340.233 1015.746,340.36 1015.746,509.651
VCC on Bottom Layer "VCC" (solid, remove dead copper, pour order 9): 1025.525,509.651 1025.525,340.233 1030.351,340.233 1030.351,509.651 1025.525,509.651

## Keep-outs
Keep-Out Layer:
  lines w0.203: 1015.365,339.852 1015.365,509.905 1015.492,510.032 1030.605,510.032 1030.605,339.852 1015.365,339.852

## Silkscreen, mask and mechanical layers (free items; w line width, h text height)
Top Overlay:
  text "support@neuralcloudcomputing.com" at 1029,346 h0.51 r90
  text "LightShow LED30" at 1019,342.5 h0.51
  text "Neural Cloud Computing" at 1017.5,341.5 h0.51
  text "Version 1.0" at 1019.5,340.5 h0.51
Mechanical 15:
  lines w0.254: 1015.5,514.246 1015.5,514.754 ; 1017.024,513.992 1015.5,514.5 ; 1017.024,515.008 1015.5,514.5 ; 1018.023,514.5 1015.5,514.5 ; 1027.977,514.5 1030.5,514.5 ; 1028.976,513.992 1030.5,514.5 ; 1028.976,515.008 1030.5,514.5 ; 1030.5,514.246 1030.5,514.754 ; 1033.992,341.524 1034.5,340 ; 1033.992,508.476 1034.5,510 ; 1034.246,340 1034.754,340 ; 1034.246,510 1034.754,510 ; 1034.5,419.261 1034.5,340 ; 1034.5,430.739 1034.5,510 ; 1035.008,341.524 1034.5,340 ; 1035.008,508.476 1034.5,510
  text "15 (mm)" at 1018.277,513.586 h1.52
  text "170 (mm)" at 1035.414,419.515 h1.52 r90